# EAGLE board esp32-driver (EAGLE 9.6.2)
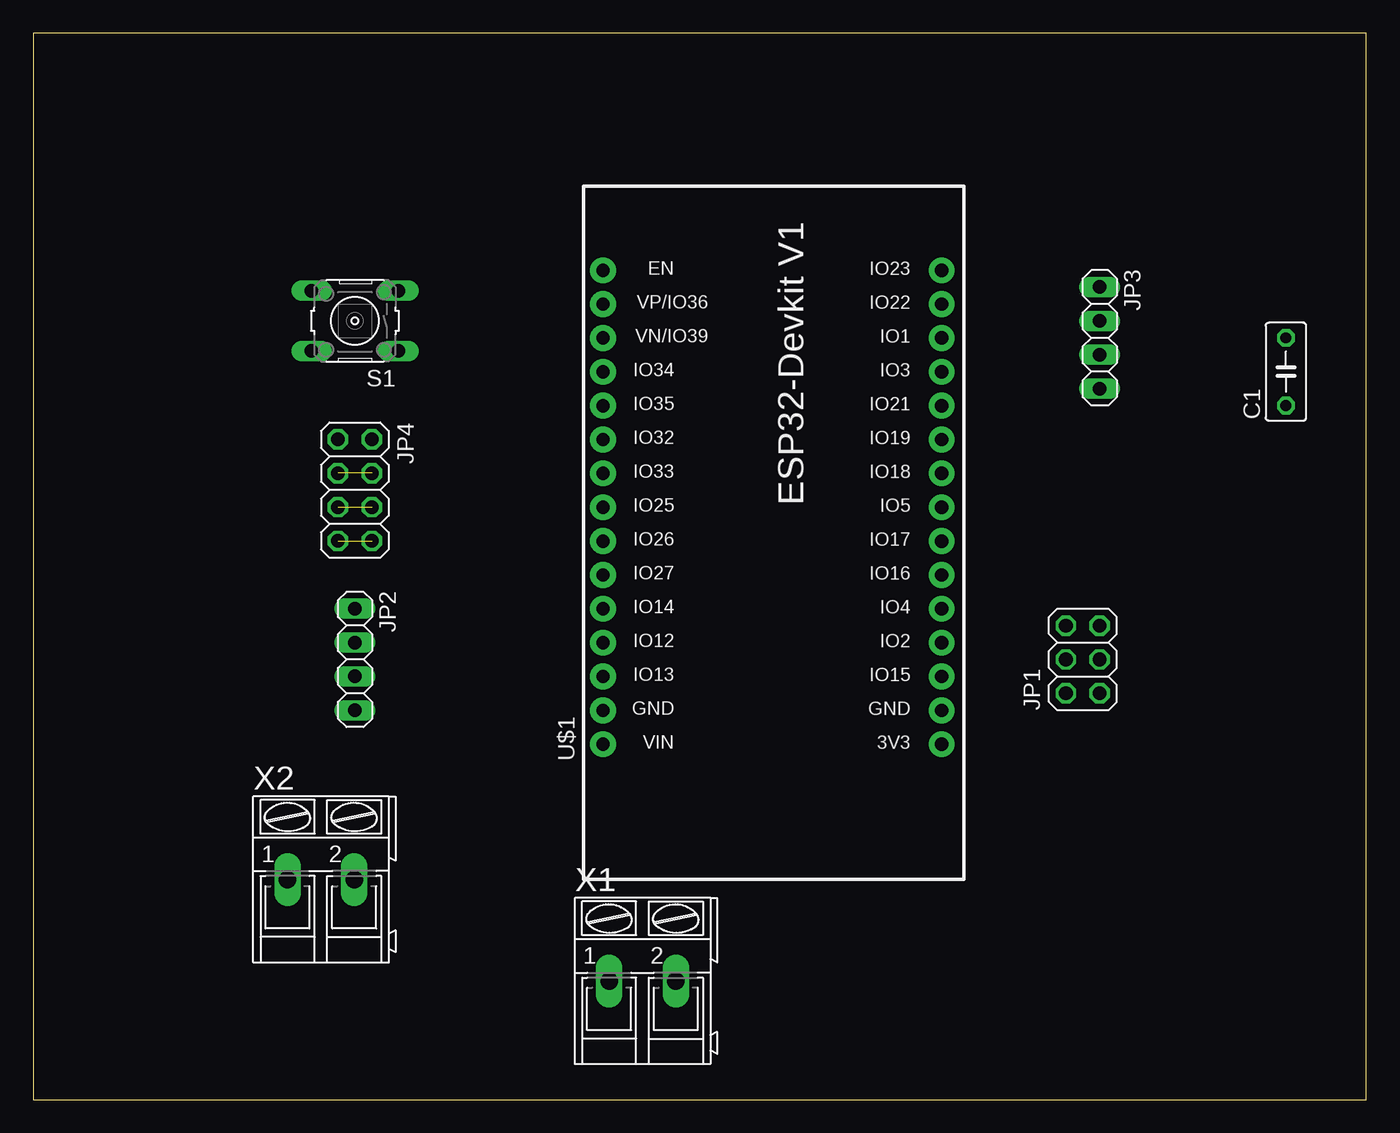
[diagram p0: board, top side]
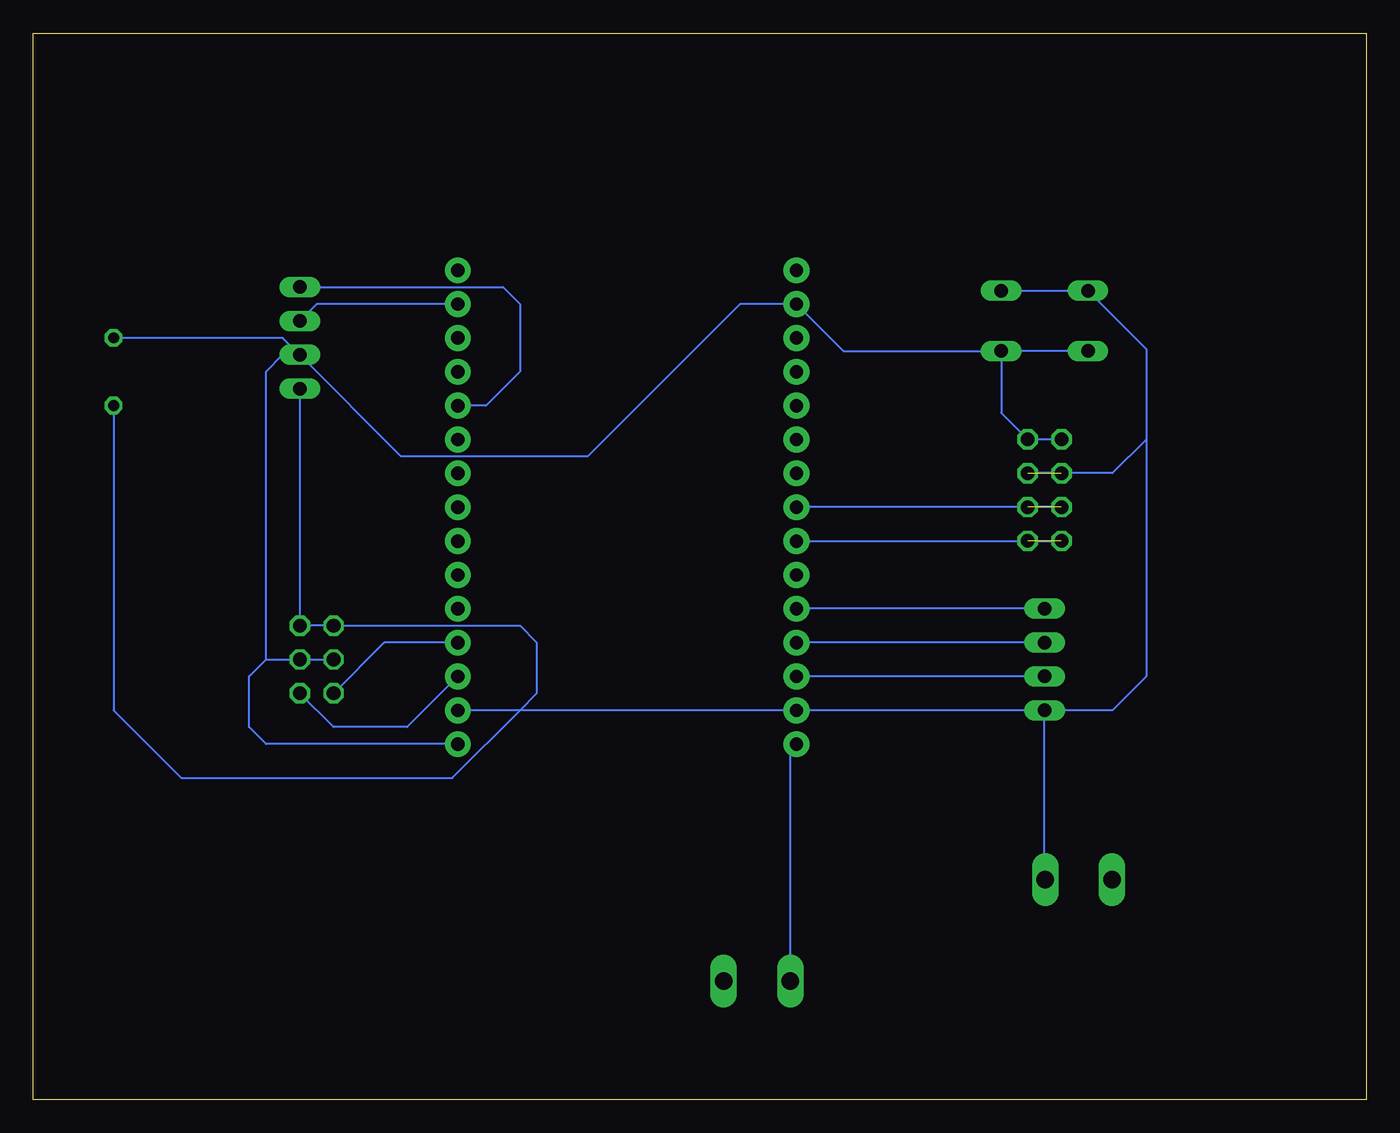
[diagram p1: board, bottom side, seen from below]

Size 100 x 80 mm. Coordinates in mm from the lower left corner, seen from the top.
Outline: 0,0 100,0 100,80 0,80 0,0
Copper layers (1*16): Top 0.035mm / dielectric 1.5mm / Bottom 0.035mm
Design rules "default": minimum track width 6mil, minimum drill 0.35mm, track to track 6mil, track to pad 6mil, pad to pad 6mil, via to via 6mil, smd to smd 6mil, copper to edge 40mil, drill to drill 6mil, minimum pad ring 10mil, minimum via ring 8mil, stop-mask expansion 4mil, vias tented up to drill 0mil, thermal gap 10mil

## Footprints (pad centres in the part's own frame; a part is rotated, then mirrored left to right if it is on the bottom)
C050-030X075 = drill 0.813 octagon: 1 -2.54,0; 2 2.54,0
2X03 = drill 1.016 octagon: 1 -2.54,-1.27; 2 -2.54,1.27; 3 0,-1.27; 4 0,1.27; 5 2.54,-1.27; 6 2.54,1.27
1X04 = drill 1.016 long: 1 -3.81,0; 2 -1.27,0; 3 1.27,0; 4 3.81,0
2X04 = drill 1.016 octagon: 1 -3.81,-1.27; 2 -3.81,1.27; 3 -1.27,-1.27; 4 -1.27,1.27; 5 1.27,-1.27; 6 1.27,1.27; 7 3.81,-1.27; 8 3.81,1.27
B3F-10XX = drill 1.016 long: 1 -3.251,2.261; 2 3.251,2.261; 3 -3.251,-2.261; 4 3.251,-2.261
ESP32-DEVKITV1 = drill 1 pad 1.93: 3V3 -16.52,-12.27; D1 13.96,-12.27; D2 -8.9,-12.27; D3 11.42,-12.27; D4 -6.36,-12.27; D5 1.26,-12.27; D12 -8.9,13.135; D13 -11.44,13.135; D14 -6.36,13.135; D15 -11.44,-12.27; D16 -3.82,-12.27; D17 -1.28,-12.27; D18 3.8,-12.27; D19 6.34,-12.27; D21 8.88,-12.27; D22 16.5,-12.27; D23 19.04,-12.27; D25 1.26,13.135; D26 -1.28,13.135; D27 -3.82,13.135; D32 6.34,13.135; D33 3.8,13.135; D34 11.42,13.135; D35 8.88,13.135; D36 16.5,13.135; D39 13.96,13.135; EN 19.04,13.135; GND@1 -13.98,13.135; GND@2 -13.98,-12.27; VIN -16.52,13.135
AK300/2 = drill 1.321 long: 1 -2.515,0; 2 2.489,0

## Placement (x,y rotation side)
C1  [C050-030X075]  93.98,54.61 90 top
JP1  [2X03]  78.74,33.02 90 top
JP2  [1X04]  24.13,33.02 270 top
JP3  [1X04]  80.01,57.15 270 top
JP4  [2X04]  24.13,45.72 270 top
S1  [B3F-10XX]  24.13,58.42 180 top
U$1  ESP32DEVKITV1  [ESP32-DEVKITV1]  55.88,43.18 90 top
X1  [AK300/2]  45.72,8.89 0 top
X2  [AK300/2]  21.59,16.51 0 top

## Library data of the parts
C1 = rcl; SPICEPREFIX: C
JP1-JP4 = pinhead
S1 = switch-omron; MPN: B3F-1000; OC_FARNELL: 176432; OC_NEWARK: 36M3542
U$1 = esp32-devkitv1
X1 X2 = con-ptr500; OC_FARNELL: unknown; OC_NEWARK: unknown

## Nets
GND: C1.1 JP1.5 JP1.6 JP2.4 JP3.4 JP4.3 JP4.4 S1.3 S1.4 U$1.GND@1 U$1.GND@2 X2.2
MOISTURE: JP1.2 U$1.D2
OUT1: JP2.1 U$1.D14
OUT2: JP2.2 U$1.D12
OUT3: JP2.3 U$1.D13
PH: JP1.1 U$1.D15
SCL: JP3.2 U$1.D22
SCL2: JP4.5 JP4.6 U$1.D25
SDA: JP3.1 U$1.D21
SDA2: JP4.7 JP4.8 U$1.D26
V: C1.2 JP1.3 JP1.4 JP3.3 JP4.1 JP4.2 S1.1 S1.2 U$1.3V3 U$1.D36
VIN: U$1.VIN X1.1

## Tracks (layer width: path | path; a pad name or v marks a point on that pad's centre or on a via)
GND  (1 unrouted)
  Bottom 0.152: JP2.4 42.73,29.21 U$1.GND@1 63.5,29.2 | X2.2 24.13,16.56 JP2.4 | 63.5,29.2 U$1.GND@2 | 63.5,29.2 62.23,30.47 62.23,34.29 63.5,35.56 JP1.6 JP1.5 JP3.4 | C1.1 93.98,29.21 88.9,24.13 68.57,24.13 63.5,29.2 | S1.3 S1.4 16.51,56.31 16.51,49.53 | 16.51,49.53 19.05,46.99 JP4.4 | 16.51,49.53 16.51,31.75 19.05,29.21 JP2.4
MOISTURE
  Bottom 0.152: U$1.D2 73.67,34.28 JP1.2
OUT1
  Bottom 0.152: JP2.1 42.73,36.83 U$1.D14
OUT2
  Bottom 0.152: JP2.2 42.73,34.29 U$1.D12
OUT3
  Bottom 0.152: JP2.3 42.73,31.75 U$1.D13
PH
  Bottom 0.152: U$1.D15 71.95,27.94 77.47,27.94 JP1.1
SCL
  Bottom 0.152: U$1.D22 78.75,59.68 JP3.2
SCL2  (1 unrouted)
  Bottom 0.152: JP4.5 42.73,44.45 U$1.D25
SDA
  Bottom 0.152: JP3.1 64.77,60.96 63.5,59.69 63.5,54.61 66.05,52.06 U$1.D21
SDA2  (1 unrouted)
  Bottom 0.152: U$1.D26 JP4.7
V
  Bottom 0.152: JP1.4 JP1.3 82.55,33.02 | U$1.3V3 82.55,26.67 83.82,27.94 83.82,31.75 82.55,33.02 | 82.55,33.02 82.55,54.61 81.28,55.88 JP3.3 | JP3.3 81.28,57.15 C1.2 | 27.38,55.88 S1.1 39.22,56.16 U$1.D36 47,59.68 58.42,48.26 72.39,48.26 JP3.3 | 27.38,55.88 27.38,51.51 JP4.2 JP4.1 | S1.2 27.1,56.16 27.38,55.88
VIN
  Bottom 0.152: X1.1 43.2,26.2 U$1.VIN